# EAGLE board PI3523_EVAL_v2 (EAGLE 9.6.2)
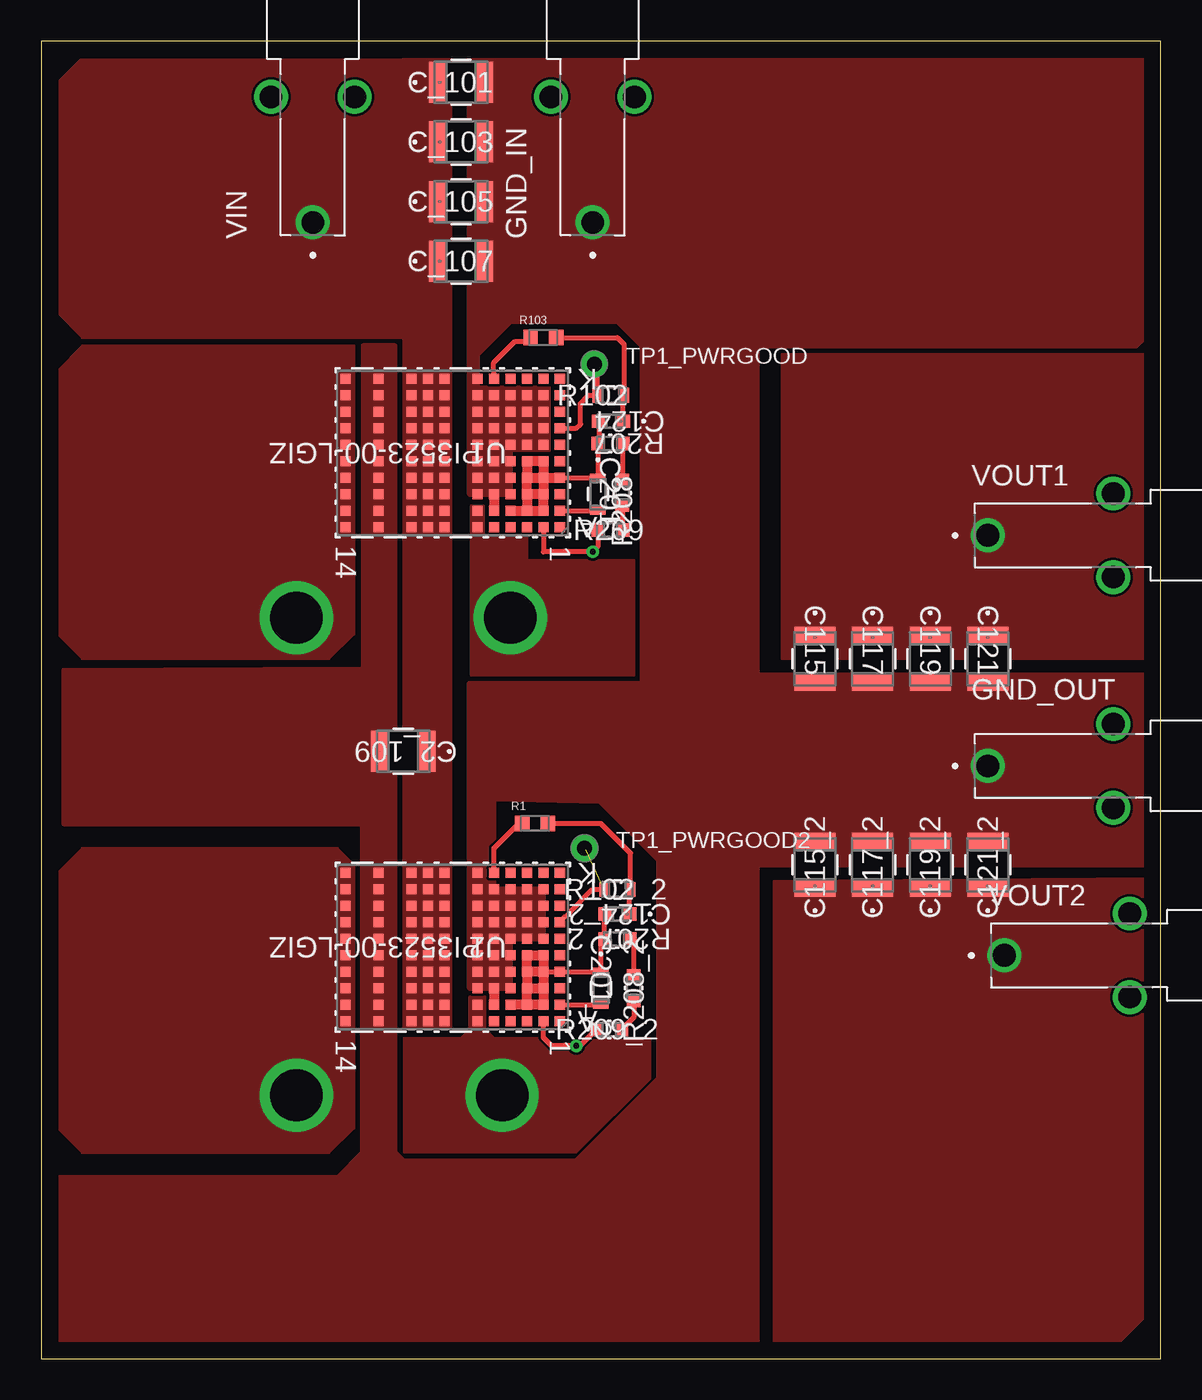
[diagram p0: board, top side]
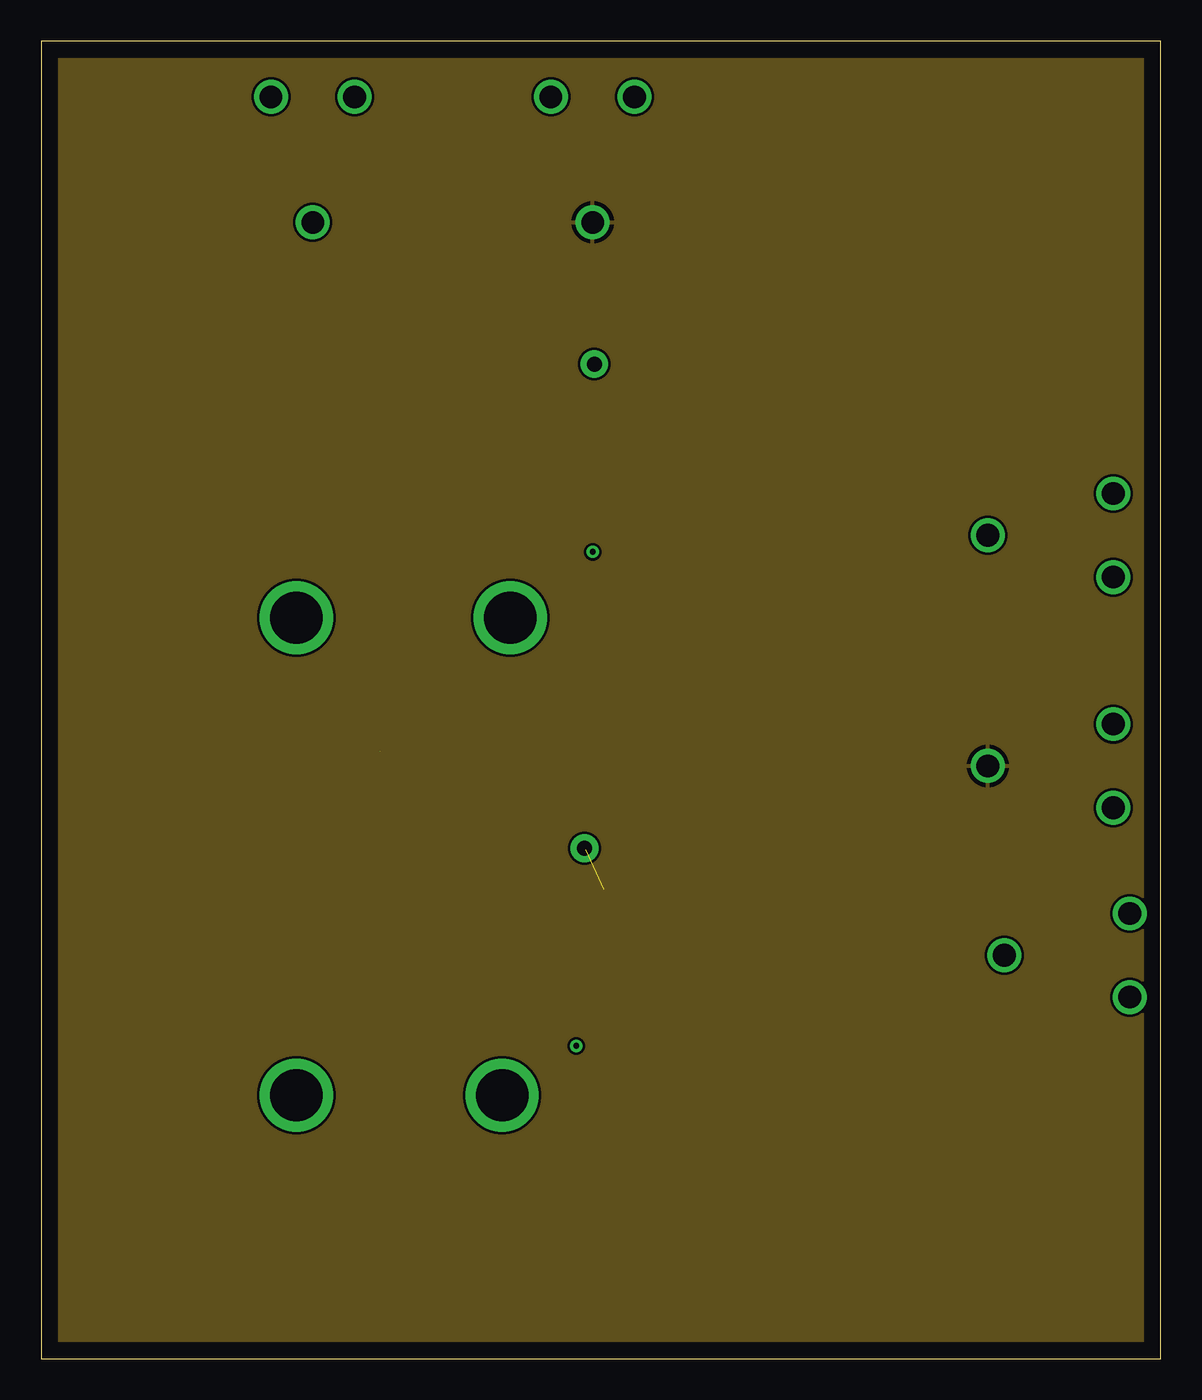
[diagram p1: board, inner layer Route15]
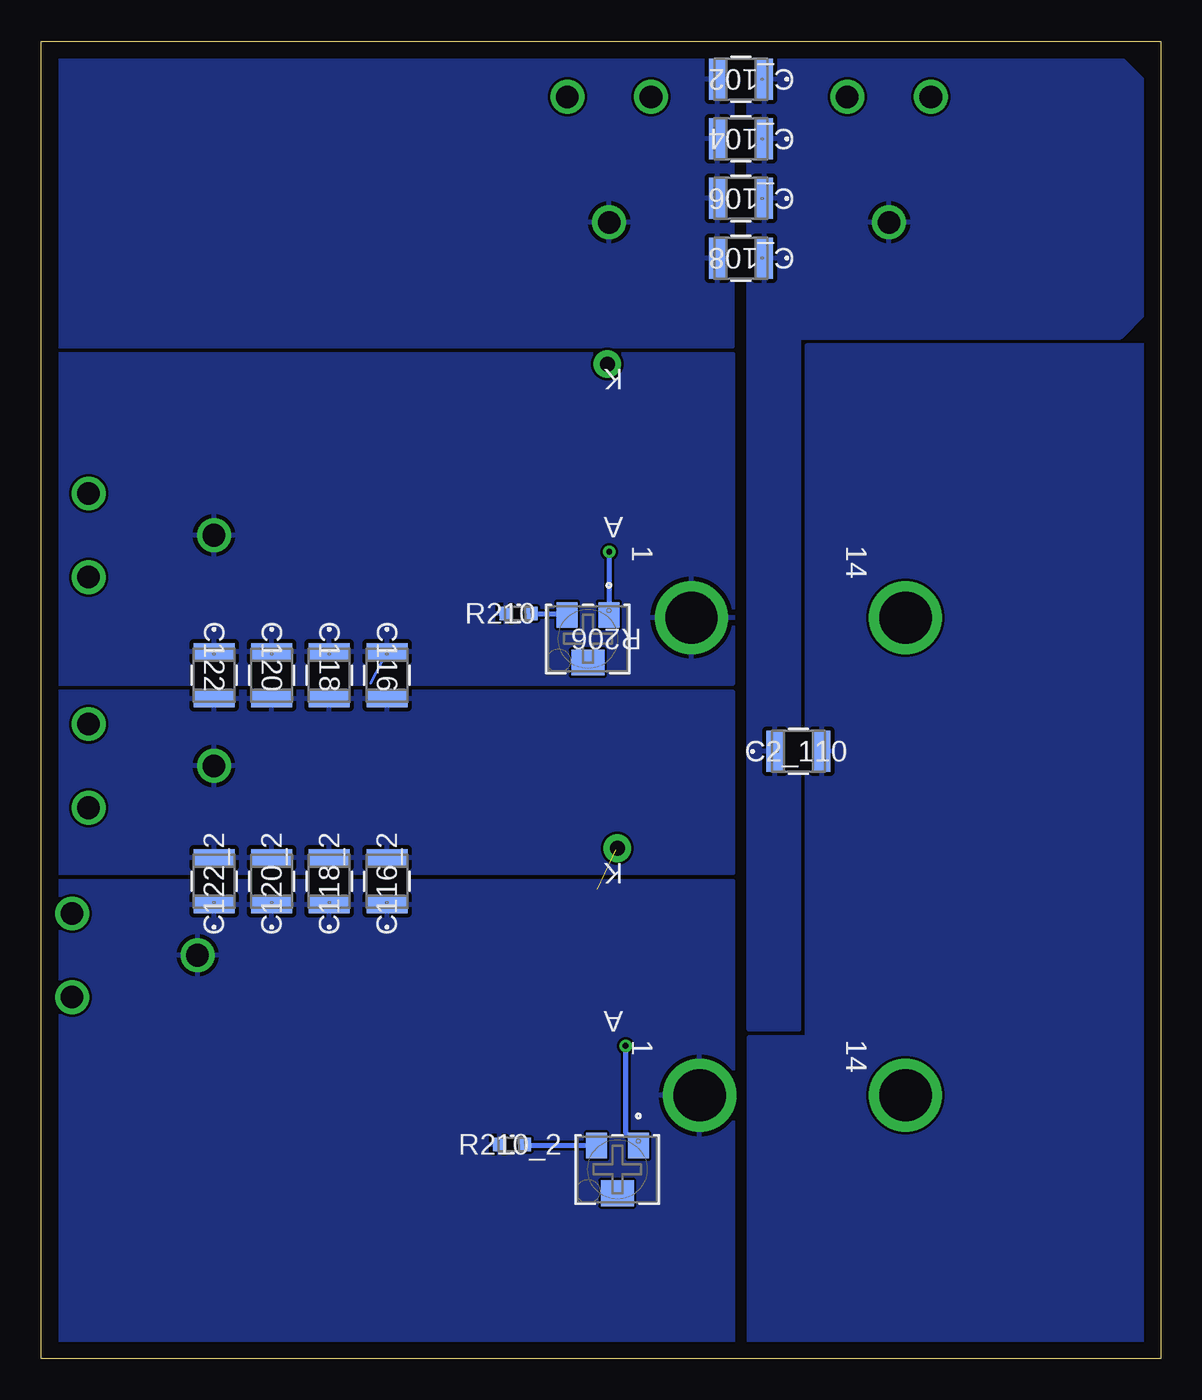
[diagram p2: board, bottom side, seen from below]

Size 68 x 80 mm. Coordinates in mm from the lower left corner, seen from the top.
Outline: 0,0 68,0 68,80 0,80 0,0
Copper layers (1+2*15+16): Top 0.035mm / dielectric 1.5mm / Route2 0.035mm / dielectric 0.15mm / Route15 0.035mm / dielectric 0.2mm / Bottom 0.035mm
Design rules "default *": minimum track width 6mil, minimum drill 0.35mm, track to track 6mil, track to pad 6mil, pad to pad 6mil, via to via 6mil, smd to smd 6mil, copper to edge 40mil, drill to drill 6mil, minimum pad ring 10mil, minimum via ring 8mil, stop-mask expansion 4mil, vias tented up to drill 0mil, thermal gap 10mil

## Footprints (pad centres in the part's own frame; a part is rotated, then mirrored left to right if it is on the bottom)
G-32_MUR = smd 1.061 x 2.489: 1 -1.42,0; 2 1.42,0
G-188_MUR = smd 0.858 x 0.813: 1 -0.721,0; 2 0.721,0
CAP_C1608_TDK = smd 0.553 x 0.94: 1 -0.975,0; 2 0.975,0
TE_350180 = drill 1.372: 1 0,0; S1 7.62,2.54; S2 7.62,-2.54
BEAGLEBONEBLACK_MOUNTING_HOLE = drill 3.175 pad 4.445: P$1 0,0
RESC1608X55N = smd 0.87 x 0.93: 1 -0.78,0; 2 0.78,0
RES_TTD1002F_KOA = smd 0.606 x 0.889: 1 -0.798,0; 2 0.798,0
POT_3224W = smd 1.27 x 1.549: 1 -1.27,-1.448; 3 1.27,-1.448 | smd 2.007 x 1.549: 2 0,1.448
RC0603N_YAG = smd 0.756 x 0.813: 1 -0.772,0; 2 0.772,0
TESTPOINT_PAD-036 = drill 0.914 pad 1.676: 1 0,0
LGA_PI3523-00-LGIZ_VIC = smd 0.61 x 0.61: A1 -6.5,4.5; A2 -5.5,4.5; A3 -4.5,4.5; A4 -3.5,4.5; A5 -2.5,4.5; A6 -1.5,4.5; A8 0.5,4.5; A9 1.5,4.5; A10 2.5,4.5; A12 4.5,4.5; A14 6.5,4.5; B1 -6.5,3.5; B2 -5.5,3.5; B3 -4.5,3.5; B4 -3.5,3.5; B5 -2.5,3.5; B6 -1.5,3.5; B8 0.5,3.5; B9 1.5,3.5; B10 2.5,3.5; B12 4.5,3.5; B14 6.5,3.5; C1 -6.5,2.5; C2 -5.5,2.5; C3 -4.5,2.5; C4 -3.5,2.5; C5 -2.5,2.5; C6 -1.5,2.5; C8 0.5,2.5; C9 1.5,2.5; C10 2.5,2.5; C12 4.5,2.5; C14 6.5,2.5; D1 -6.5,1.5; D2 -5.5,1.5; D3 -4.5,1.5; D4 -3.5,1.5; D5 -2.5,1.5; D6 -1.5,1.5; D8 0.5,1.5; D9 1.5,1.5; D10 2.5,1.5; D12 4.5,1.5; D14 6.5,1.5; E1 -6.5,0.5; E2 -5.5,0.5; E3 -4.5,0.5; E4 -3.5,0.5; E5 -2.5,0.5; E6 -1.5,0.5; E8 0.5,0.5; E9 1.5,0.5; E10 2.5,0.5; E12 4.5,0.5; E14 6.5,0.5; F1 -6.5,-0.5; F2 -5.5,-0.5; F3 -4.5,-0.5; F4 -3.5,-0.5; F5 -2.5,-0.5; F6 -1.5,-0.5; F8 0.5,-0.5; F9 1.5,-0.5; F10 2.5,-0.5; F12 4.5,-0.5; F14 6.5,-0.5; G1 -6.5,-1.5; G2 -5.5,-1.5; G3 -4.5,-1.5; G4 -3.5,-1.5; G5 -2.5,-1.5; G6 -1.5,-1.5; G8 0.5,-1.5; G9 1.5,-1.5; G10 2.5,-1.5; G12 4.5,-1.5; G14 6.5,-1.5; H1 -6.5,-2.5; H2 -5.5,-2.5; H3 -4.5,-2.5; H4 -3.5,-2.5; H5 -2.5,-2.5; H6 -1.5,-2.5; H8 0.5,-2.5; H9 1.5,-2.5; H10 2.5,-2.5; H12 4.5,-2.5; H14 6.5,-2.5; J1 -6.5,-3.5; J2 -5.5,-3.5; J3 -4.5,-3.5; J4 -3.5,-3.5; J5 -2.5,-3.5; J6 -1.5,-3.5; J8 0.5,-3.5; J9 1.5,-3.5; J10 2.5,-3.5; J12 4.5,-3.5; J14 6.5,-3.5; K1 -6.5,-4.5; K2 -5.5,-4.5; K3 -4.5,-4.5; K4 -3.5,-4.5; K5 -2.5,-4.5; K6 -1.5,-4.5; K8 0.5,-4.5; K9 1.5,-4.5; K10 2.5,-4.5; K12 4.5,-4.5; K14 6.5,-4.5

## Placement (x,y rotation side)
C2_109  GRM32ER72A225KA35L  [G-32_MUR]  22,36.88 180 top
C2_110  GRM32ER72A225KA35L  [G-32_MUR]  22,36.88 0 bottom
C115  GRM32ER72A225KA35K  [G-32_MUR]  47,42.5 270 top
C115_2  GRM32ER72A225KA35K  [G-32_MUR]  47,30 90 top
C116  GRM32ER72A225KA35K  [G-32_MUR]  47,41.5 270 bottom
C116_2  GRM32ER72A225KA35K  [G-32_MUR]  47,29 90 bottom
C117  GRM32ER72A225KA35K  [G-32_MUR]  50.5,42.5 270 top
C117_2  GRM32ER72A225KA35K  [G-32_MUR]  50.5,30 90 top
C118  GRM32ER72A225KA35K  [G-32_MUR]  50.5,41.5 270 bottom
C118_2  GRM32ER72A225KA35K  [G-32_MUR]  50.5,29 90 bottom
C119  GRM32ER72A225KA35K  [G-32_MUR]  54,42.5 270 top
C119_2  GRM32ER72A225KA35K  [G-32_MUR]  54,30 90 top
C120  GRM32ER72A225KA35K  [G-32_MUR]  54,41.5 270 bottom
C120_2  GRM32ER72A225KA35K  [G-32_MUR]  54,29 90 bottom
C121  GRM32ER72A225KA35K  [G-32_MUR]  57.5,42.5 270 top
C121_2  GRM32ER72A225KA35K  [G-32_MUR]  57.5,30 90 top
C122  GRM32ER72A225KA35K  [G-32_MUR]  57.5,41.5 270 bottom
C122_2  GRM32ER72A225KA35K  [G-32_MUR]  57.5,29 90 bottom
C124  GRM188R72A104KA35J  [G-188_MUR]  34.61,56.92 180 top
C124_2  GRM188R72A104KA35J  [G-188_MUR]  35,27 180 top
C201  C1608C0G2A472J080AC  [CAP_C1608_TDK]  33.81,52.5 270 top
C201_2  C1608C0G2A472J080AC  [CAP_C1608_TDK]  34,22.5 270 top
C_101  GRM32ER72A225KA35L  [G-32_MUR]  25.5,77.5 0 top
C_102  GRM32ER72A225KA35L  [G-32_MUR]  25.5,77.69 180 bottom
C_103  GRM32ER72A225KA35L  [G-32_MUR]  25.5,73.88 0 top
C_104  GRM32ER72A225KA35L  [G-32_MUR]  25.5,74.07 180 bottom
C_105  GRM32ER72A225KA35L  [G-32_MUR]  25.5,70.26 0 top
C_106  GRM32ER72A225KA35L  [G-32_MUR]  25.5,70.45 180 bottom
C_107  GRM32ER72A225KA35L  [G-32_MUR]  25.5,66.64 0 top
C_108  GRM32ER72A225KA35L  [G-32_MUR]  25.5,66.83 180 bottom
GND_IN  350180  [TE_350180]  33.5,69 90 top
GND_OUT  350180  [TE_350180]  57.5,36 0 top
MGT1  MOUNTING_HOLE  [BEAGLEBONEBLACK_MOUNTING_HOLE]  15.5,45 0 top
MGT2  MOUNTING_HOLE  [BEAGLEBONEBLACK_MOUNTING_HOLE]  28.5,45 0 top
MGT3  MOUNTING_HOLE  [BEAGLEBONEBLACK_MOUNTING_HOLE]  15.5,16 0 top
MGT4  MOUNTING_HOLE  [BEAGLEBONEBLACK_MOUNTING_HOLE]  28,16 0 top
R1  RK73H1JTTD1001F  [RESC1608X55N]  30,32.5 0 top
R102  RK73H1JTTD1002F  [RES_TTD1002F_KOA]  34.6,58.5 0 top
R102_2  RK73H1JTTD1002F  [RES_TTD1002F_KOA]  35,28.5 0 top
R103  RK73H1JTTD1001F  [RESC1608X55N]  30.5,62 0 top
R206  3224W-1-502E  [POT_3224W]  34.79,43.72 180 bottom
R206_2  3224W-1-502E  [POT_3224W]  33,11.5 180 bottom
R207  RC0603FR-077R5L  [RC0603N_YAG]  34.58,55.58 180 top
R207_2  RC0603FR-077R5L  [RC0603N_YAG]  35,25.5 180 top
R208  RT0603BRD071KL  [RC0603N_YAG]  35.29,52.58 90 top
R208_2  RT0603BRD071KL  [RC0603N_YAG]  36,22.5 90 top
R209  RT0603BRD071K37L  [RC0603N_YAG]  34.58,50.32 0 top
R209_2  RT0603BRD071K37L  [RC0603N_YAG]  34.5,20 0 top
R210  RT0603BRE072K4L  [RC0603N_YAG]  39,45.25 0 bottom
R210_2  RT0603BRE072K4L  [RC0603N_YAG]  39.4,13.01 0 bottom
TP1_PWRGOOD  TESTPOINT_TPS-PAD-036  [TESTPOINT_PAD-036]  33.6,60.4 0 top
TP1_PWRGOOD2  TESTPOINT_TPS-PAD-036  [TESTPOINT_PAD-036]  33,31 0 top
U1  PI3523-00-LGIZ  [LGA_PI3523-00-LGIZ_VIC]  25,55 180 top
U2  PI3523-00-LGIZ  [LGA_PI3523-00-LGIZ_VIC]  25,25 180 top
VIN  350180  [TE_350180]  16.5,69 90 top
VOUT1  350180  [TE_350180]  57.5,50 0 top
VOUT2  350180  [TE_350180]  58.5,24.5 0 top

## Library data of the parts
C2_109 C2_110 C_101-C_108 = PI3523_1_1_ul_GRM32ER72A225KA35L; COPYRIGHT: Copyright (C) 2015 Accelerated Designs. All rights reserved; MANUFACTURER_PART_NUMBER: GRM32ER72A225KA35L; SOURCELIBRARY: Murata_2014-12-31; VENDOR: Murata
C115 C115_2 C116 C116_2 C117 C117_2 C118 C118_2 C119 C119_2 C120 C120_2 C121 C121_2 C122 C122_2 = PI3523_C111~; COPYRIGHT: Copyright (C) 2015 Accelerated Designs. All rights reserved; MANUFACTURER_PART_NUMBER: GRM32ER72A225KA35K; SOURCELIBRARY: Murata_2014-12-31; VENDOR: Murata
C124 C124_2 = PI3523_C124; COPYRIGHT: Copyright (C) 2015 Accelerated Designs. All rights reserved; MANUFACTURER_PART_NUMBER: GRM188R72A104KA35J; SOURCELIBRARY: Murata_2014-12-31; VENDOR: Murata
C201 C201_2 = PI3523_1_3_ul_C1608C0G2A472J080AC; BUILT_BY: EMA_Matt; COPYRIGHT: Copyright (C) 2018 Accelerated Designs. All rights reserved; MANUFACTURER_PART_NUMBER: C1608C0G2A472J080AC; SOURCELIBRARY: TDK_2019-10-09; VENDOR: TDK
GND_IN GND_OUT VIN VOUT1 VOUT2 = PI3523_banana_connector_350180; AVAILABILITY: Good; COMMENT: 350180; DESCRIPTION: Connector TeStraight Probe RCP 3 Position Solder Right Angle Thru-Hole 1 Port; MF: TE Connectivity; MP: 350180; PACKAGE: None; PRICE: None; PURCHASE-URL: https://pricing.snapeda.com/search/part/350180/?ref=eda
MGT1-MGT4 = BeagleBone_Blue_R3
R1 R103 = PI3523_R103; AVAILABILITY: Good; DESCRIPTION: 1 kOhms ±1% 0.125W, 1/8W Chip Resistor 0603 (1608 Metric) Automotive AEC-Q200, Moisture Resistant Thick Film; MF: KOA Speer; MP: RK73H1JTTD1001F; PACKAGE: 0603 KOA Speer; PRICE: None; PURCHASE-URL: https://pricing.snapeda.com/search/part/RK73H1JTTD1001F/?ref=eda
R102 R102_2 = PI3523_R102; BUILT_BY: EMA_Matt; COPYRIGHT: Copyright (C) 2018 Accelerated Designs. All rights reserved; DATASHEET: https://www.mouser.com/datasheet/2/219/RK73H-1825326.pdf; MANUFACTURER_PART_NUMBER: RK73H1JTTD1002F; SOURCELIBRARY: Add_to_database_2021-01-18; VENDOR: KOA Speer
R206 R206_2 = PI3523_R206; BUILT_BY: EMA_UL_Team; MANUFACTURER_PART_NUMBER: 3224W-1-502E; SOURCELIBRARY: Bourns_2012-08-08; VENDOR: Bourns Electronics
R207 R207_2 = PI3523_R207; BUILT_BY: EMA_UL_Team; MANUFACTURER_PART_NUMBER: RC0603FR-077R5L; SOURCELIBRARY: Yageo_2008-01-01_ChipRes1b; VENDOR: Yageo
R208 R208_2 = PI3523_R208; BUILT_BY: EMA_UL_Team; MANUFACTURER_PART_NUMBER: RT0603BRD071KL; SOURCELIBRARY: Yageo_2008-01-01_ChipRes2b; VENDOR: Yageo
R209 R209_2 = PI3523_R209; BUILT_BY: EMA_UL_Team; MANUFACTURER_PART_NUMBER: RT0603BRD071K37L; SOURCELIBRARY: Yageo_2008-01-01_ChipRes2b; VENDOR: Yageo
R210 R210_2 = PI3523_R210; BUILT_BY: EMA_UL_Team; MANUFACTURER_PART_NUMBER: RT0603BRE072K4L; SOURCELIBRARY: Yageo_2008-01-01_ChipRes3a; VENDOR: Yageo
TP1_PWRGOOD TP1_PWRGOOD2 = 52101-101-REV-A_v16; BOM: EXCLUDE
U1 U2 = PI3523_00LGIZ; BUILT_BY: EMA_Justin; COPYRIGHT: Copyright (C) 2018 Accelerated Designs. All rights reserved; MANUFACTURER_PART_NUMBER: PI3523-00-LGIZ; SOURCELIBRARY: Add_to_database_2021-01-28; VENDOR: Vicor

## Nets
COMP: C201.2 U1.B1
COMP2: C201_2.2 U2.B1
EAIN: R206.1 R209.1 U1.A2
EAIN2: R206_2.1 R209_2.1 U2.A2
N$1: R207.1 R208.2
N$2: R208.1 R209.2
N$3: R206.3 R210.2
N$4: R207_2.1 R208_2.2
N$5: R208_2.1 R209_2.2
N$6: R206_2.3 R210_2.2
N$7: C124_2.1 R1.2 R102_2.2
N$9: C124.1 R102.2 R103.2
PGND: C2_109.2 C2_110.2 C115.2 C115_2.2 C116.2 C116_2.2 C117.2 C117_2.2 C118.2 C118_2.2 C119.2 C119_2.2 C120.2 C120_2.2 C121.2 C121_2.2 C122.2 C122_2.2 C_101.2 C_102.2 C_103.2 C_104.2 C_105.2 C_106.2 C_107.2 C_108.2 GND_IN.1 GND_OUT.1 U1.A12 U1.B5 U1.B12 U1.C4 U1.C5 U1.C6 U1.C12 U1.D4 U1.D5 U1.D6 U1.D12 U1.E4 U1.E5 U1.E6 U1.E12 U1.F2 U1.F3 U1.F4 U1.F5 U1.F6 U1.F12 U1.G2 U1.G3 U1.G4 U1.G5 U1.G6 U1.G12 U1.H2 U1.H3 U1.H4 U1.H5 U1.H6 U1.H12 U1.J2 U1.J3 U1.J4 U1.J5 U1.J6 U1.J12 U1.K6 U1.K12 U2.A12 U2.B5 U2.B12 U2.C4 U2.C5 U2.C6 U2.C12 U2.D4 U2.D5 U2.D6 U2.D12 U2.E4 U2.E5 U2.E6 U2.E12 U2.F2 U2.F3 U2.F4 U2.F5 U2.F6 U2.F12 U2.G2 U2.G3 U2.G4 U2.G5 U2.G6 U2.G12 U2.H2 U2.H3 U2.H4 U2.H5 U2.H6 U2.H12 U2.J2 U2.J3 U2.J4 U2.J5 U2.J6 U2.J12 U2.K6 U2.K12
PWRGOOD: R102.1 TP1_PWRGOOD.1 U1.G1
PWRGOOD2: R102_2.1 TP1_PWRGOOD2.1 U2.G1
SGND: C124.2 C201.1 R207.2 U1.B2 U1.B3 U1.B4 U1.C2 U1.C3 U1.D1 U1.D2 U1.D3 U1.E2 U1.E3
SGND2: C124_2.2 C201_2.1 R207_2.2 U2.B2 U2.B3 U2.B4 U2.C2 U2.C3 U2.D1 U2.D2 U2.D3 U2.E2 U2.E3
VDR: R103.1 U1.K5
VDR2: R1.1 U2.K5
VIN: C2_109.1 C2_110.1 C_101.1 C_102.1 C_103.1 C_104.1 C_105.1 C_106.1 C_107.1 C_108.1 U1.A8 U1.A9 U1.A10 U1.B8 U1.B9 U1.B10 U1.C8 U1.C9 U1.C10 U1.D8 U1.D9 U1.D10 U1.E8 U1.E9 U1.E10 U1.F8 U1.F9 U1.F10 U1.G8 U1.G9 U1.G10 U1.H8 U1.H9 U1.H10 U1.J8 U1.J9 U1.J10 U1.K8 U1.K9 U1.K10 U2.A8 U2.A9 U2.A10 U2.B8 U2.B9 U2.B10 U2.C8 U2.C9 U2.C10 U2.D8 U2.D9 U2.D10 U2.E8 U2.E9 U2.E10 U2.F8 U2.F9 U2.F10 U2.G8 U2.G9 U2.G10 U2.H8 U2.H9 U2.H10 U2.J8 U2.J9 U2.J10 U2.K8 U2.K9 U2.K10 VIN.1
VOUT: C115.1 C116.1 C117.1 C118.1 C119.1 C120.1 C121.1 C122.1 MGT2.P$1 R210.1 U1.A6 U1.B6 VOUT1.1
VOUT2: C115_2.1 C116_2.1 C117_2.1 C118_2.1 C119_2.1 C120_2.1 C121_2.1 C122_2.1 MGT4.P$1 R210_2.1 U2.A6 U2.B6 VOUT2.1
VS1: MGT1.P$1 U1.A14 U1.B14 U1.C14 U1.D14 U1.E14 U1.F14 U1.G14 U1.H14 U1.J14 U1.K14
VS12: MGT3.P$1 U2.A14 U2.B14 U2.C14 U2.D14 U2.E14 U2.F14 U2.G14 U2.H14 U2.J14 U2.K14

## Tracks (layer width: path | path; a pad name or v marks a point on that pad's centre or on a via)
COMP
  Top 0.3: U1.B1 33.79,51.5 C201.2
COMP2
  Top 0.3: U2.B1 33.98,21.5 C201_2.2
EAIN  (via drill 0.35)
  Top 0.152: U1.A2 | U1.A2 30.5,50.48 | U1.A2 30.5,49.72 | 30.5,49.72 30.45,49.66 | 33.91,50 33.91,50.21 R209.1 | 30.5,49.72 30.5,49
  Top 0.3: U1.A2 30.5,49 v33.5,49 33.81,49.31 R209.1
  Bottom 0.3: v33.5,49 33.5,45.18 R206.1
EAIN2  (via drill 0.35)
  Top 0.3: R209_2.1 32.73,19 v32.5,19 31,19 30.5,19.5 U2.A2
  Bottom 0.3: v32.5,19 32.5,13.72 R206_2.1
N$1
  Top 0.3: R208.2 35.35,53.41 R207.1
N$2
  Top 0.152: 35.35,51.75 R208.1
  Top 0.3: R209.2 35.35,51.75
N$3
  Bottom 0.3: R206.3 36.15,45.25 R210.2
N$4
  Top 0.3: R208_2.2 36,25.27 R207_2.1
N$5
  Top 0.3: R208_2.1 36,20.73 R209_2.2
N$6
  Bottom 0.3: R206_2.3 38.56,12.95 R210_2.2
N$7
  Top 0.152: 36,28.5 R102_2.2 35.89,28.59 | R1.2 30.89,32.39 31,32.28
  Top 0.3: C124_2.1 35.72,28.42 R102_2.2 35.8,30.7 34,32.5 31,32.5 30.89,32.39
N$9
  Top 0.152: 35.6,58.5 35.5,58.5 R102.2 35.33,58.43 C124.1
  Top 0.3: C124.1 35.33,58.33 35.5,58.5 | R102.2 35.4,61.6 35,62 R103.2
PGND  (1 unrouted)
  Top 0.6: U1.C5 U1.B5 | U2.C5 U2.B5
  pour Route15: 0,80 0,0 68,0 68,80
  pour Top (no thermals): 26.14,55.12 30.87,55.12 30.87,59.01 26.14,59.01
  pour Top (no thermals): 21.5,61.5 19.55,61.5 19.55,41.85 1.36,41.79 1.36,32.5 19.5,32.5 19.5,12.5 18,11 1,11 1,0.5 43.5,0.5 43.5,30 67.5,30 67.5,41.5 43.5,41.5 43.5,61.5 66.5,61.5 67,62 67,79.5 26,79.5 26,52.5 28.5,52.5 28.5,55.5 30.5,55.5 30.5,58.5 26.5,58.5 26.5,61 28.5,63 35,63 36.5,61.5 36.5,41 26,41 26,22.5 28.5,22.5 28.5,25.5 30.5,25.5 30.5,28.5 27.5,28.5 27.5,34.01 33.94,33.87 37.5,30.31 37.5,17 32.5,12 22,12 21.5,12.5
  pour Bottom: 67,40.5 26,40.5 26,29.5 67,29.5
  pour Bottom: 26,61.5 26,79 67,79 67,61.5
  pour Bottom: 1,61.5 21.5,61.5 21.5,19.5 25,19.5 25,1 1,1
PWRGOOD
  Top 0.152: 32.76,56.76 32.76,58 | 33.5,58.5 R102.1
  Top 0.3: U1.G1 32.5,56.5 32.75,56.75 | 32.75,56.75 32.76,56.76 | 32.75,56.75 32.75,57.99 32.76,58 33.26,58.5 33.5,58.5 | R102.1 33.81,60.19 TP1_PWRGOOD.1
PWRGOOD2  (1 unrouted)
  Top 0.152: U2.G1 31.77,26.4 | TP1_PWRGOOD2.1 33.08,30.92 | 34.2,28.25 R102_2.1
  Top 0.3: U2.G1 31.89,26.89 31.93,26.89 32.11,27.07 32.11,27.11 33.5,28.5 R102_2.1
SGND
  Top 0.152: U1.B3 | U1.C3 29.5,52.48 | U1.D3 | U1.D2 | U1.E2 30.5,54.48 | U1.E3 29.5,54.48
  Top 0.3: C124.2 33.89,55.66 R207.2 C201.1 33.79,53.5 U1.D1
  Top 0.6: U1.B4 U1.B3 | U1.C2 U1.B2 U1.B3 29.5,52.48 | U1.C2 U1.C3 U1.D3 | U1.C2 U1.D2 U1.D3 29.5,54.48 | U1.D1 U1.D2 30.5,54.48 | U1.E2 U1.E3
SGND2
  Top 0.152: U2.D1 31.5,23.4
  Top 0.3: C124_2.2 34.23,26.95 R207_2.2 34,25.27 C201_2.1 33.98,23.5 U2.D1 U2.D2
  Top 0.6: U2.D2 U2.D3 | U2.D3 U2.E3 U2.E2 U2.D2 | U2.D3 U2.C3 | U2.C3 U2.C2 | U2.D2 U2.C2 | U2.C2 U2.B2 U2.B3 | U2.B3 U2.C3 | U2.B3 U2.B4
VDR
  Top 0.3: U1.K5 27.49,60.49 28.75,61.75 29.47,61.75 R103.1
VDR2
  Top 0.152: 29,32.5 R1.1
  Top 0.3: U2.K5 27.5,31 29,32.5
VIN
  pour Top (no thermals): 22,20 24.89,20 24.89,80 22,80
  pour Top (no thermals): 22,62 2.5,62 1,63.5 1,77.5 2.5,79 22,79
  pour Bottom: 25,79 2.5,79 1,77.5 1,63.5 2.5,62 22,62 22,20 25,20
VOUT
  Top 0.3: MGT2.P$1 29,46
  Bottom 0.152: C116.1 47.99,41.02
  pour Top (no thermals): 26.11,51.79 26.88,51.79 26.88,50 29.5,50 29.5,48.5 36,48.5 36,41.5 26.11,41.5
  pour Top (no thermals): 45,61 68,61 68,61 68,42.5 45,42.5
  pour Bottom: 67,61 26,61 26,41 67,41
VOUT2
  pour Top (no thermals): 44.5,29.01 68,29.17 68,3.5 65,0.5 44.5,0.5
  pour Top (no thermals): 27,22 26,22 26,20 25.5,19.5 22,19.5 22,12.5 32.5,12.5 37,17 37,19.5 27.5,19.5 27,20
  pour Bottom: 67,1 67,29 26,29 26,1
VS1
  pour Top (no thermals): 19,44 17.5,42.5 2.5,42.5 1,44 1,60 2.5,61.5 19,61.5
VS12
  pour Top (no thermals): 19,14 17.5,12.5 2.5,12.5 1,14 1,29.5 2.5,31 18,31 19,30